# EAGLE board chess.job (EAGLE 6.1)

Size 360 x 360 mm. Coordinates in mm from the lower left corner, seen from the top.
Outline: 0,0 360,0 360,360 0,360 0,0
Copper layers (1*16): Top 0.035mm / dielectric 1.5mm / Bottom 0.035mm
Design rules: minimum track width 10mil, minimum drill 24mil, track to track 8mil, track to pad 8mil, pad to pad 8mil, via to via 8mil, smd to smd 8mil, copper to edge 40mil, drill to drill 8mil, minimum pad ring 10mil, minimum via ring 8mil, stop-mask expansion 4mil, vias tented up to drill 0mil, thermal gap 10mil
Net classes: 0 default: width 0.356 mm
Holes 6 mm at 10,350 350,350 350,10 10,10

## Footprints (pad centres in the part's own frame; a part is rotated, then mirrored left to right if it is on the bottom)
DIL16 = drill 0.813 long: 1 -8.89,-3.81; 2 -6.35,-3.81; 3 -3.81,-3.81; 4 -1.27,-3.81; 5 1.27,-3.81; 6 3.81,-3.81; 7 6.35,-3.81; 8 8.89,-3.81; 9 8.89,3.81; 10 6.35,3.81; 11 3.81,3.81; 12 1.27,3.81; 13 -1.27,3.81; 14 -3.81,3.81; 15 -6.35,3.81; 16 -8.89,3.81
1X13 = drill 1.016 long: 1 -15.24,0; 2 -12.7,0; 3 -10.16,0; 4 -7.62,0; 5 -5.08,0; 6 -2.54,0; 7 0,0; 8 2.54,0; 9 5.08,0; 10 7.62,0; 11 10.16,0; 12 12.7,0; 13 15.24,0
LED5MM = drill 0.813 octagon: A -1.27,0; K 1.27,0

## Placement (x,y rotation side)
IC1  74HC595N  [DIL16]  60,320 0 top
IC2  74HC595N  [DIL16]  60,240 0 top
IC3  74HC595N  [DIL16]  60,160 0 top
IC4  74HC595N  [DIL16]  60,80 0 top
IC5  74HC595N  [DIL16]  160,20 0 top
IC6  74HC595N  [DIL16]  220,320 0 top
IC7  74HC595N  [DIL16]  220,240 0 top
IC8  74HC595N  [DIL16]  220,160 0 top
IC9  74HC595N  [DIL16]  220,80 0 top
IC10  74HC595N  [DIL16]  340,200 0 top
IC11  74HC595N  [DIL16]  320,40 0 top
JP1  JP1  [1X13]  80,350 0 top
LED1  [LED5MM]  20,340 0 top
LED2  [LED5MM]  60,340 0 top
LED3  [LED5MM]  100,340 0 top
LED4  [LED5MM]  140,340 0 top
LED5  [LED5MM]  20,300 0 top
LED6  [LED5MM]  60,300 0 top
LED7  [LED5MM]  100,300 0 top
LED8  [LED5MM]  140,300 0 top
LED9  [LED5MM]  20,260 0 top
LED10  [LED5MM]  60,260 0 top
LED11  [LED5MM]  100,260 0 top
LED12  [LED5MM]  140,260 0 top
LED13  [LED5MM]  20,220 0 top
LED14  [LED5MM]  60,220 0 top
LED15  [LED5MM]  100,220 0 top
LED16  [LED5MM]  140,220 0 top
LED17  [LED5MM]  20,180 0 top
LED18  [LED5MM]  60,180 0 top
LED19  [LED5MM]  100,180 0 top
LED20  [LED5MM]  140,180 0 top
LED21  [LED5MM]  20,140 0 top
LED22  [LED5MM]  60,140 0 top
LED23  [LED5MM]  100,140 0 top
LED24  [LED5MM]  140,140 0 top
LED25  [LED5MM]  20,100 0 top
LED26  [LED5MM]  60,100 0 top
LED27  [LED5MM]  100,100 0 top
LED28  [LED5MM]  140,100 0 top
LED29  [LED5MM]  20,60 0 top
LED30  [LED5MM]  60,60 0 top
LED31  [LED5MM]  100,60 0 top
LED32  [LED5MM]  140,60 0 top
LED33  [LED5MM]  20,20 0 top
LED34  [LED5MM]  60,20 0 top
LED35  [LED5MM]  100,20 0 top
LED36  [LED5MM]  140,20 0 top
LED37  [LED5MM]  180,20 0 top
LED38  [LED5MM]  220,20 0 top
LED39  [LED5MM]  260,20 0 top
LED40  [LED5MM]  300,20 0 top
LED41  [LED5MM]  180,340 0 top
LED42  [LED5MM]  220,340 0 top
LED43  [LED5MM]  260,340 0 top
LED44  [LED5MM]  300,340 0 top
LED45  [LED5MM]  180,300 0 top
LED46  [LED5MM]  220,300 0 top
LED47  [LED5MM]  260,300 0 top
LED48  [LED5MM]  300,300 0 top
LED49  [LED5MM]  180,260 0 top
LED50  [LED5MM]  220,260 0 top
LED51  [LED5MM]  260,260 0 top
LED52  [LED5MM]  300,260 0 top
LED53  [LED5MM]  180,220 0 top
LED54  [LED5MM]  220,220 0 top
LED55  [LED5MM]  260,220 0 top
LED56  [LED5MM]  300,220 0 top
LED57  [LED5MM]  180,180 0 top
LED58  [LED5MM]  220,180 0 top
LED59  [LED5MM]  260,180 0 top
LED60  [LED5MM]  300,180 0 top
LED61  [LED5MM]  180,140 0 top
LED62  [LED5MM]  220,140 0 top
LED63  [LED5MM]  260,140 0 top
LED64  [LED5MM]  300,140 0 top
LED65  [LED5MM]  180,100 0 top
LED66  [LED5MM]  220,100 0 top
LED67  [LED5MM]  260,100 0 top
LED68  [LED5MM]  300,100 0 top
LED69  [LED5MM]  180,60 0 top
LED70  [LED5MM]  220,60 0 top
LED71  [LED5MM]  260,60 0 top
LED72  [LED5MM]  300,60 0 top
LED73  [LED5MM]  340,340 0 top
LED74  [LED5MM]  340,300 0 top
LED75  [LED5MM]  340,260 0 top
LED76  [LED5MM]  340,220 0 top
LED77  [LED5MM]  340,180 0 top
LED78  [LED5MM]  340,140 0 top
LED79  [LED5MM]  340,100 0 top
LED80  [LED5MM]  340,60 0 top
LED81  [LED5MM]  340,20 0 top

## Library data of the parts
IC1-IC11 = 74xx-eu
JP1 = pinhead
LED1-LED81 = led

## Nets
G: IC1.13 IC2.13 IC3.13 IC4.13 IC5.13 IC6.13 IC7.13 IC8.13 IC9.13 IC10.13 IC11.13
GND: IC1.8 IC2.8 IC3.8 IC4.8 IC5.8 IC6.8 IC7.8 IC8.8 IC9.8 IC10.8 IC11.8 JP1.13 LED1.K LED2.K LED3.K LED4.K LED5.K LED6.K LED7.K LED8.K LED9.K LED10.K LED11.K LED12.K LED13.K LED14.K LED15.K LED16.K LED17.K LED18.K LED19.K LED20.K LED21.K LED22.K LED23.K LED24.K LED25.K LED26.K LED27.K LED28.K LED29.K LED30.K LED31.K LED32.K LED33.K LED34.K LED35.K LED36.K LED37.K LED38.K LED39.K LED40.K LED41.K LED42.K LED43.K LED44.K LED45.K LED46.K LED47.K LED48.K LED49.K LED50.K LED51.K LED52.K LED53.K LED54.K LED55.K LED56.K LED57.K LED58.K LED59.K LED60.K LED61.K LED62.K LED63.K LED64.K LED65.K LED66.K LED67.K LED68.K LED69.K LED70.K LED71.K LED72.K LED73.K LED74.K LED75.K LED76.K LED77.K LED78.K LED79.K LED80.K LED81.K
N$1: IC1.9 IC2.14
N$2: IC9.7 LED72.A
N$3: IC1.7 LED8.A
N$4: IC1.6 LED7.A
N$5: IC1.5 LED6.A
N$6: IC1.4 LED5.A
N$7: IC1.3 LED4.A
N$8: IC1.2 LED3.A
N$9: IC1.1 LED2.A
N$10: IC1.15 LED1.A
N$11: IC3.7 LED24.A
N$12: IC3.6 LED23.A
N$13: IC2.7 LED16.A
N$14: IC2.6 LED15.A
N$15: IC2.5 LED14.A
N$16: IC2.4 LED13.A
N$17: IC2.3 LED12.A
N$18: IC2.2 LED11.A
N$19: IC2.1 LED10.A
N$20: IC2.15 LED9.A
N$21: IC3.5 LED22.A
N$22: IC3.4 LED21.A
N$23: IC3.3 LED20.A
N$24: IC3.2 LED19.A
N$25: IC3.1 LED18.A
N$26: IC3.15 LED17.A
N$27: IC9.6 LED71.A
N$28: IC2.9 IC3.14
N$29: IC4.7 LED32.A
N$30: IC4.6 LED31.A
N$31: IC4.5 LED30.A
N$32: IC4.4 LED29.A
N$33: IC4.3 LED28.A
N$34: IC4.2 LED27.A
N$35: IC4.1 LED26.A
N$36: IC4.15 LED25.A
N$37: IC9.5 LED70.A
N$38: IC3.9 IC4.14
N$39: IC5.7 LED40.A
N$40: IC5.6 LED39.A
N$41: IC5.5 LED38.A
N$42: IC5.4 LED37.A
N$43: IC5.3 LED36.A
N$44: IC5.2 LED35.A
N$45: IC5.1 LED34.A
N$46: IC5.15 LED33.A
N$47: IC9.4 LED69.A
N$48: IC4.9 IC5.14
N$49: IC6.7 LED48.A
N$50: IC6.6 LED47.A
N$51: IC6.5 LED46.A
N$52: IC6.4 LED45.A
N$53: IC6.3 LED44.A
N$54: IC6.2 LED43.A
N$55: IC6.1 LED42.A
N$56: IC6.15 LED41.A
N$57: IC9.3 LED68.A
N$58: IC5.9 IC6.14
N$59: IC7.7 LED56.A
N$60: IC7.6 LED55.A
N$61: IC7.5 LED54.A
N$62: IC7.4 LED53.A
N$63: IC7.3 LED52.A
N$64: IC7.2 LED51.A
N$65: IC7.1 LED50.A
N$66: IC7.15 LED49.A
N$67: IC9.2 LED67.A
N$68: IC6.9 IC7.14
N$69: IC8.7 LED64.A
N$70: IC8.6 LED63.A
N$71: IC8.5 LED62.A
N$72: IC8.4 LED61.A
N$73: IC8.3 LED60.A
N$74: IC8.2 LED59.A
N$75: IC8.1 LED58.A
N$76: IC8.15 LED57.A
N$77: IC9.1 LED66.A
N$78: IC7.9 IC8.14
N$79: IC9.15 LED65.A
N$80: IC8.9 IC9.14
N$81: IC10.7 LED80.A
N$82: IC10.6 LED79.A
N$83: IC10.5 LED78.A
N$84: IC10.4 LED77.A
N$85: IC10.3 LED76.A
N$86: IC10.2 LED75.A
N$87: IC10.1 LED74.A
N$88: IC10.15 LED73.A
N$89: IC9.9 IC10.14
N$97: IC11.15 LED81.A
N$98: IC10.9 IC11.14
RCK: IC1.12 IC2.12 IC3.12 IC4.12 IC5.12 IC6.12 IC7.12 IC8.12 IC9.12 IC10.12 IC11.12 JP1.4
SCK: IC1.11 IC2.11 IC3.11 IC4.11 IC5.11 IC6.11 IC7.11 IC8.11 IC9.11 IC10.11 IC11.11 JP1.6
SCL: IC1.10 IC2.10 IC3.10 IC4.10 IC5.10 IC6.10 IC7.10 IC8.10 IC9.10 IC10.10 IC11.10 JP1.7
SER: IC1.14 JP1.2 JP1.3
VCC: IC1.16 IC2.16 IC3.16 IC4.16 IC5.16 IC6.16 IC7.16 IC8.16 IC9.16 IC10.16 IC11.16 JP1.1

## Tracks (layer width: path | path; a pad name or v marks a point on that pad's centre or on a via)
G  (10 unrouted)
GND  (92 unrouted)
N$1  (1 unrouted)
N$2  (1 unrouted)
N$3  (1 unrouted)
N$4  (1 unrouted)
N$5  (1 unrouted)
N$6  (1 unrouted)
N$7  (1 unrouted)
N$8  (1 unrouted)
N$9  (1 unrouted)
N$10  (1 unrouted)
N$11  (1 unrouted)
N$12  (1 unrouted)
N$13  (1 unrouted)
N$14  (1 unrouted)
N$15  (1 unrouted)
N$16  (1 unrouted)
N$17  (1 unrouted)
N$18  (1 unrouted)
N$19  (1 unrouted)
N$20  (1 unrouted)
N$21  (1 unrouted)
N$22  (1 unrouted)
N$23  (1 unrouted)
N$24  (1 unrouted)
N$25  (1 unrouted)
N$26  (1 unrouted)
N$27  (1 unrouted)
N$28  (1 unrouted)
N$29  (1 unrouted)
N$30  (1 unrouted)
N$31  (1 unrouted)
N$32  (1 unrouted)
N$33  (1 unrouted)
N$34  (1 unrouted)
N$35  (1 unrouted)
N$36  (1 unrouted)
N$37  (1 unrouted)
N$38  (1 unrouted)
N$39  (1 unrouted)
N$40  (1 unrouted)
N$41  (1 unrouted)
N$42  (1 unrouted)
N$43  (1 unrouted)
N$44  (1 unrouted)
N$45  (1 unrouted)
N$46  (1 unrouted)
N$47  (1 unrouted)
N$48  (1 unrouted)
N$49  (1 unrouted)
N$50  (1 unrouted)
N$51  (1 unrouted)
N$52  (1 unrouted)
N$53  (1 unrouted)
N$54  (1 unrouted)
N$55  (1 unrouted)
N$56  (1 unrouted)
N$57  (1 unrouted)
N$58  (1 unrouted)
N$59  (1 unrouted)
N$60  (1 unrouted)
N$61  (1 unrouted)
N$62  (1 unrouted)
N$63  (1 unrouted)
N$64  (1 unrouted)
N$65  (1 unrouted)
N$66  (1 unrouted)
N$67  (1 unrouted)
N$68  (1 unrouted)
N$69  (1 unrouted)
N$70  (1 unrouted)
N$71  (1 unrouted)
N$72  (1 unrouted)
N$73  (1 unrouted)
N$74  (1 unrouted)
N$75  (1 unrouted)
N$76  (1 unrouted)
N$77  (1 unrouted)
N$78  (1 unrouted)
N$79  (1 unrouted)
N$80  (1 unrouted)
N$81  (1 unrouted)
N$82  (1 unrouted)
N$83  (1 unrouted)
N$84  (1 unrouted)
N$85  (1 unrouted)
N$86  (1 unrouted)
N$87  (1 unrouted)
N$88  (1 unrouted)
N$89  (1 unrouted)
N$97  (1 unrouted)
N$98  (1 unrouted)
RCK  (11 unrouted)
SCK  (11 unrouted)
SCL  (11 unrouted)
SER  (2 unrouted)
VCC  (11 unrouted)